# Altium PCB PCB_all_try.PcbDoc (part 2 of 5)
Units mm, origin at the board's own origin, x right, y up, seen from the top; angles counter-clockwise.
Board outline 345 x 240 mm, 2 copper layers (Top Layer, Bottom Layer); 484 components, 419 nets, 1569 pads, 699 vias.
Unrouted connection lines stored in the file: 63.
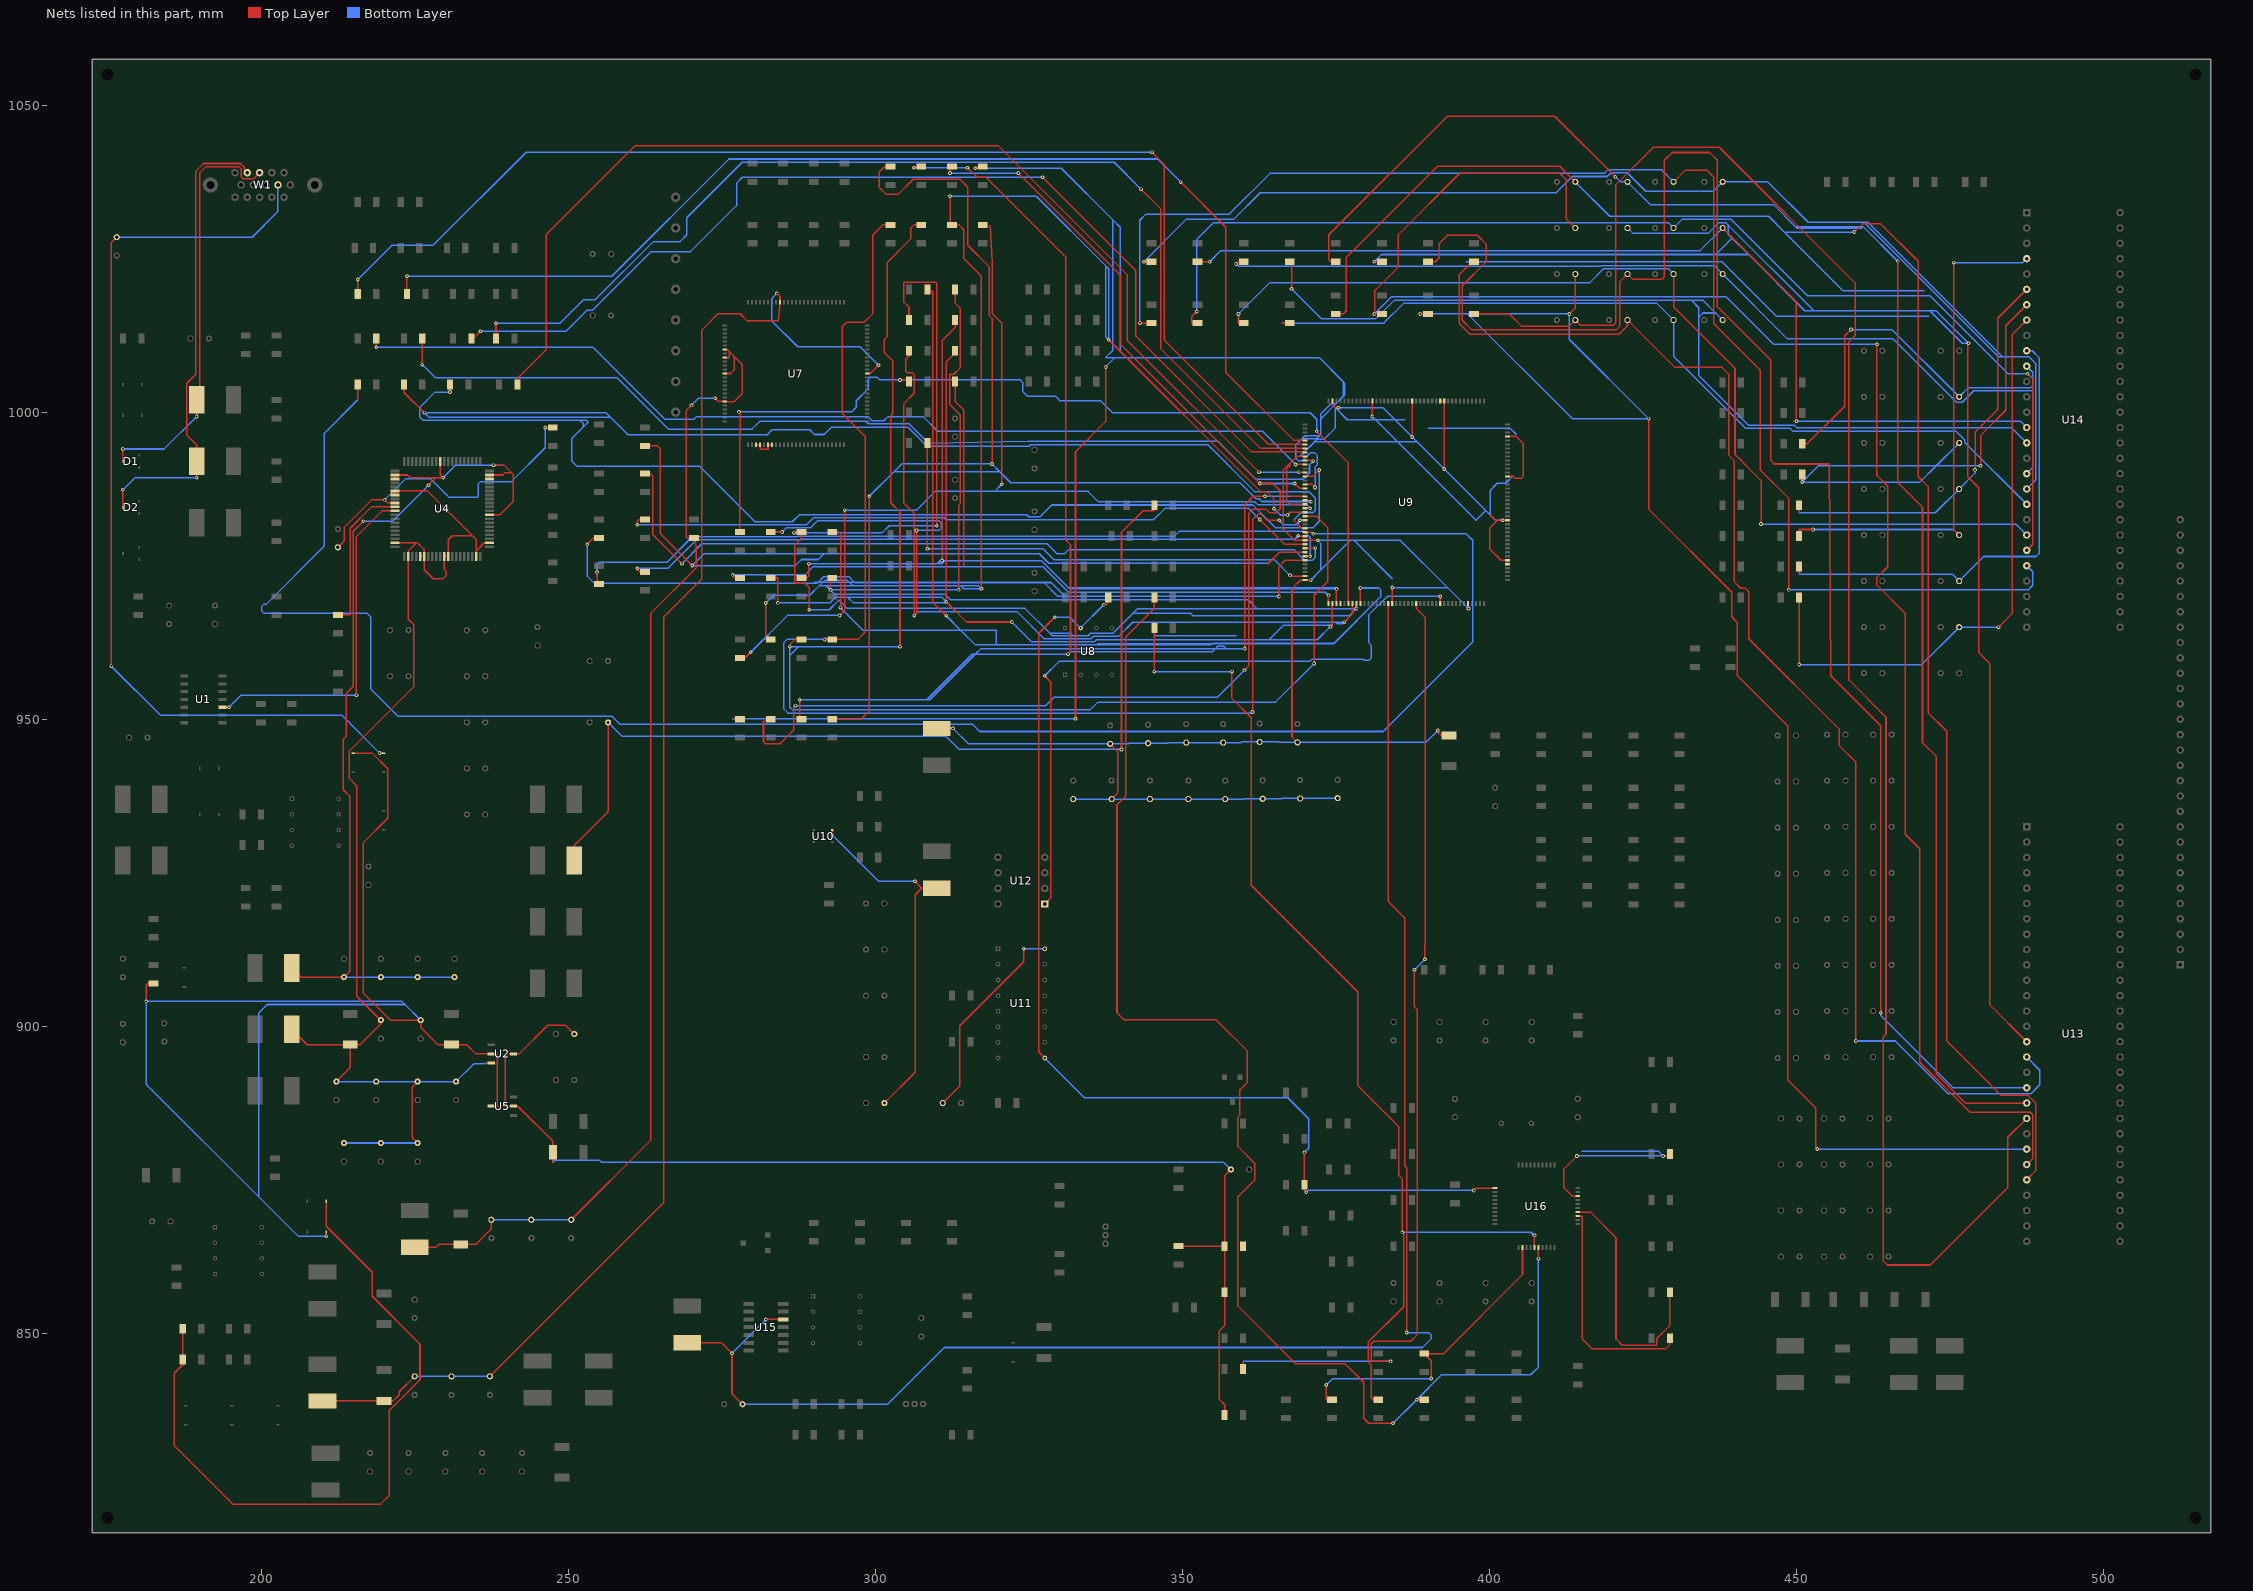
[diagram p2: the nets of this part, all layers, seen from the top]

## Via types
v1: diameter 0.6, hole 0.3, Top Layer to Bottom Layer, 699 vias

## Nets (pads, with @x,y where several pads share a name; then routed paths per layer and width w, separated by ;. In a path a pad name is that pad's centre, name@x,y a point inside that pad or via, vN(x,y) a via of type N, cw(c..) or ccw(c..) an arc to the next point about the centre after c; other vN are vias at no path point) (continued)
3V3SD: C64.1 C65.2 C66.2 C67.2 C68.2 C69.2 C71.2 C73.2 C75.2 C77.2 C81.2 C85.2 C89.2 C94.2 C98.2 L19.2 U9.17 U9.36 U9.45 U9.46 U9.56 U9.67 U9.77 U9.91 U9.92 U9.99 U9.109 U9.119 U9.129 U9.141 U9.150 U9.160 | length 436.1
  Top Layer w0.25: L19.2@310,948.5 312.662,948.5 v1(312.674,948.512) ; C98.2@338.25,946 339.496,944.754 339.496,937.996 C73.2@338.5,937 ; C77.2@368.75,946.25 367.868,947.132 367.868,971.296 369.222,972.65 U9.160@370,972.65 v1(370.906,972.65) ; U9.141@370,985 367.506,985 366.986,985.52 366.986,991.14 ; U9.129@370,992.8 368.646,992.8 367.462,991.616 ; v1(372.062,979.15) U9.150@370,979.15 368.269,979.15 366.47,980.949 366.47,990.624 366.986,991.14 ; U9.119@374.45,1001.8 374.45,1001.198 374.936,1000.712 v1(375.444,1000.712) ; v1(380.95,999.286) U9.109@380.95,1001.8 ; U9.17@384.2,968.85 v1(384.2,971.448) ; v1(387.45,995.961) U9.99@387.45,1001.8 ; v1(391.592,948.157) 391.592,947.928 392.17,947.35 C64.1@393.45,947.35 ; U9.92@392,1001.8 U9.91@392.65,1001.8 v1(392.65,990.761) ; U9.36@396.55,968.85 396.55,968.065 v1(396.596,968.019) ; 400.137,983.274 401.165,982.246 ; v1(402.133,982.396) 401.316,982.396 ; U9.45@402.95,975.25 U9.46@402.95,975.9 401.923,975.9 400.082,977.741 400.082,981.162 401.165,982.246 ; U9.56@402.95,982.4 402.133,982.4 401.316,982.396 ; U9.67@402.95,989.55 403.767,989.55 ; U9.77@402.95,996.05 404.368,996.05 405.486,994.932 405.486,989.521 405.225,989.261 404.156,989.261 403.867,989.55 ; 366.986,991.14 367.462,991.616 ; 366.986,991.14 367.462,991.14 367.462,991.616 ; 401.165,982.246 401.316,982.396
  Bottom Layer w0.25: v1(312.674,948.512) 315.186,946 C98.2@338.25,946 341.3,946 341.4,946.1 C94.2@344.45,946.1 347.497,946.1 347.597,946.2 C89.2@350.65,946.2 C85.2@356.65,946.2 359.562,946.2 359.662,946.3 C81.2@362.6,946.3 365.633,946.3 365.683,946.25 C77.2@368.75,946.25 389.685,946.25 v1(391.592,948.157) ; C75.2@332.25,937 C73.2@338.5,937 C71.2@344.75,937 C69.2@351,937 C68.2@357,937 360.02,937 360.07,937.05 C67.2@363.1,937.05 366.116,937.05 366.166,937.1 C66.2@369.2,937.1 372.212,937.1 372.262,937.15 C65.2@375.3,937.15 ; 369.164,992.81 371.952,995.599 373.09,995.599 374.936,997.445 374.936,1000.712 376.87,998.778 381.458,998.778 ; 369.173,992.8 371.556,995.183 385.053,995.183 ; v1@370.899,972.642 v1(370.906,972.65) 372.516,974.26 ; v1(375.444,1000.712) 382.699,1000.712 384.633,998.778 ; v1(380.95,999.286) 381.458,998.778 ; v1(384.2,971.448) 393.167,971.448 ; 384.2,972.896 377.946,979.15 ; 386.254,998.778 384.633,998.778 ; 390.042,997.382 403.377,997.382 404.368,996.391 ; v1(396.596,968.019) 393.167,971.448 ; v1(402.133,982.396) 401.015,982.396 400.137,983.274 ; 403.767,989.55 403.767,989.516 ; 403.867,989.55 403.801,989.55 403.767,989.516 ; 372.516,974.26 377.406,979.15 ; 372.516,974.26 372.516,978.695 v1(372.062,979.15) 377.406,979.15 ; 377.406,979.15 377.946,979.15 ; 377.946,979.15 385.465,979.15 393.167,971.448 ; 381.458,998.778 384.633,998.778 ; 381.458,998.778 385.053,995.183 ; 384.633,998.778 v1(387.45,995.961) 388.228,995.183 ; 385.053,995.183 397.84,982.396 399.428,983.983 ; 385.053,995.183 388.228,995.183 ; 388.228,995.183 v1(392.65,990.761) 399.428,983.983 ; 399.428,983.983 400.137,983.274 ; 400.137,983.274 400.137,987.258 401.295,988.416 402.666,988.416 403.767,989.516
5V_DDC: D6.1 R50.2 R51.2 | length 115.4
  Top Layer w0.25: R50.2@187.25,850.75 R51.2@187.25,845.75 187.25,844.906 185.852,843.507 185.852,831.748 195.402,822.198 219.456,822.198 220.853,823.595 220.853,837.422 225.879,842.448 225.879,848.236 218.084,856.031 218.084,859.968 210.6,867.452 D6.1@210.6,871.5
5V_STBY: C6.1 C9.1 C35.1 C36.1 C169.1 D4.1 D7.1 R1.2 R206.1 R207.1 R209.1 R236.2 U2.2 U2.4 U5.2 U5.4 | length 435.7
  Top Layer w0.25: v1(181.28,904.062) 181.28,906.67 181.61,907 R1.2@182.5,907 ; v1(210.6,865.835) D7.1@210.6,866.5 ; D4.1@215,944.5 218.058,944.5 220.624,941.934 220.624,933.882 216.611,929.869 216.611,905.459 221.07,901 C9.1@226,901 226,899.82 228.82,897 C6.1@231,897 233.477,897 234.977,895.5 U2.2@237.5,895.5 238.43,895.5 238.43,887 ; U5.4@237.5,887 238.43,887 ; 247.5,877.877 C35.1@247.5,879.5 247.5,881.308 241.808,887 U5.2@241.1,887 240.284,887 ; C36.1@251,898.75 249.574,900.176 246.678,900.176 242.002,895.5 U2.4@241.1,895.5 240.284,895.5 239.776,894.992 239.776,887.508 240.284,887 ; R236.2@349.4,864.2 R206.1@356.9,864.2 ; R209.1@356.9,836.7 356.9,838.373 356.057,839.216 356.057,850.438 356.9,851.281 R207.1@356.9,856.7 R206.1@356.9,864.2 ; C169.1@357.9,876.7 356.9,875.7 R206.1@356.9,864.2 ; 238.43,887 240.284,887
  Bottom Layer w0.25: v1(210.6,865.835) 206.019,865.835 199.644,872.211 ; C9.1@226,901 223.446,903.554 ; 247.498,877.875 247.805,878.182 255.104,878.182 255.411,877.875 356.725,877.875 C169.1@357.9,876.7 ; 199.644,872.211 181.28,890.575 v1(181.28,904.062) 222.938,904.062 223.446,903.554 ; 199.644,872.211 199.644,902.208 200.99,903.554 223.446,903.554
5V_VGA: C172.2 D5.1 W1.9 | length 152.8
  Top Layer w0.25: v1(175.616,958.647) 175.616,1027.616 C172.2@176.5,1028.5 ; v1(219.304,944.5) D5.1@220,944.5
  Bottom Layer w0.25: v1(175.616,958.647) 183.591,950.671 213.132,950.671 v1(219.304,944.5) ; C172.2@176.5,1028.5 198.548,1028.5 202.75,1032.702 W1.9@202.75,1037
5Va: C130.2 U11.16 | length 34
  Top Layer w0.25: C130.2@311,887.5 313.766,890.266 313.766,900.085 324.178,910.497 v1(324.178,912.62)
  Bottom Layer w0.25: v1(324.178,912.62) U11.16@327.62,912.62
5Vb: C128.1 L20.2 U10.5 | length 58.9
  Top Layer w0.25: v1(293,931.139) U10.5@293,931.9 ; C128.1@301.5,887.5 306.502,892.502 306.502,921.408 307.594,922.5 ; v1(306.474,923.62) 307.594,922.5 ; L20.2@310,922.5 307.594,922.5
  Bottom Layer w0.25: v1(293,931.139) 300.518,923.62 v1(306.474,923.62)
12MHZ: C158.1 L24.1 U9.16 U15.12 | length 268.9
  Top Layer w0.25: L24.1@269.4,848.46 274.98,848.46 v1(276.682,846.758) 276.682,840.178 C158.1@278.4,838.46 ; v1(282.194,852.27) U15.12@285,852.27 ; U9.16@383.55,968.85 383.55,920.308 386.213,917.645 386.213,877.294 386.563,876.944 v1(386.563,850.131)
  Bottom Layer w0.25: v1(276.682,846.758) v1(282.194,852.27) ; C158.1@278.4,838.46 301.987,838.46 311.226,847.7 389.128,847.7 390.518,849.09 390.518,849.757 390.144,850.131 v1(386.563,850.131)
9883_HS: R14.2 U4.30 | length 24.8
  Top Layer w0.25: R14.2@212.5,967 214.435,967 214.518,967.083 214.518,981.101 217.991,984.575 U4.30@221.778,984.575
9883_VS: U1.10 U4.31 | length 56.5
  Top Layer w0.25: U1.10@193.7,951.96 v1(194.767,951.96) ; v1(215.526,953.922) 215.526,979.776 219.675,983.925 U4.31@221.778,983.925
  Bottom Layer w0.25: v1(194.767,951.96) 196.73,953.922 v1(215.526,953.922)
+3V3: C1.1 C2.1 C3.1 C4.1 L1.1 U4.11 U4.22 U4.23 U4.69 U4.78 U4.79 | length 157.8
  Top Layer w0.25: L1.1@205,909.5 206.5,908 C1.1@213.5,908 214.401,908.901 214.401,937.503 213.368,938.536 213.368,946.698 213.868,947.198 213.868,954.202 215.022,955.356 215.022,980.603 v1(216.662,982.243) ; U4.23@221.778,989.125 U4.22@221.778,989.775 223.876,989.775 224.321,989.33 228.466,989.33 ; v1(227.252,988.116) 228.466,989.33 ; U4.11@229.175,991.972 229.175,989.796 v1(229.641,989.33) 228.466,989.33 ; U4.69@237.222,983.275 238.852,983.275 241.09,985.513 241.09,989.863 240.792,990.161 ; U4.78@237.222,989.125 U4.79@237.222,989.775 238.926,989.775 ; v1(237.846,991.381) 239.573,991.381 240.792,990.161 ; 238.926,989.775 239.065,989.775 ; 238.926,989.775 239.065,989.914 239.065,989.775 ; 239.065,989.775 239.346,989.775 239.732,990.161 240.792,990.161
  Bottom Layer w0.25: C1.1@213.5,908 C2.1@219.5,908 C3.1@225.5,908 C4.1@231.5,908 ; v1(216.662,982.243) 221.379,982.243 v1(227.252,988.116) ; v1(229.641,989.33) 231.692,991.381 v1(237.846,991.381) 239.065,991.381
A3_3V: C57.1 C58.2 C59.2 C60.2 L18.2 R59.1 U7.82 U7.84 U7.88 U7.95 | length 194.7
  Top Layer w0.25: L18.2@225,864 228.498,864 228.998,864.5 C57.1@232.5,864.5 234.975,864.5 237.5,867.025 C58.2@237.5,868.5 ; C60.2@250.5,868.5 263.423,881.423 263.423,967.207 270.891,974.674 270.891,978.078 R59.1@270.5,979.5 269.494,979.5 269.24,979.754 269.24,1000.277 v1(270.078,1001.116) ; v1(273.939,1002.259) 274.448,1001.75 U7.95@275.5,1001.75 275.55,1001.7 277.012,1001.7 278.352,1003.039 278.352,1007.777 277.012,1009.117 ; U7.88@275.5,1006.3 276.456,1006.3 277.012,1006.856 277.012,1009.117 ; U7.84@275.5,1008.9 276.225,1008.9 276.225,1009.904 ; U7.82@275.5,1010.2 275.929,1010.2 276.225,1009.904 ; 276.225,1009.904 277.012,1009.117
  Bottom Layer w0.25: C58.2@237.5,868.5 C59.2@244,868.5 C60.2@250.5,868.5 ; v1(270.078,1001.116) 271.221,1002.259 v1(273.939,1002.259)
A3V3: C12.1 C14.1 C26.1 C28.1 C30.1 C31.1 C32.1 C33.1 C34.1 L7.1 U2.3 U4.26 U4.27 U4.39 U4.42 U4.45 U4.46 U4.51 U4.52 U4.59 U4.62 | length 205.9
  Top Layer w0.25: L7.1@205,899.5 207.5,897 C14.1@214.5,897 ; C34.1@212.25,891 214.5,893.25 C14.1@214.5,897 ; U4.39@221.778,978.725 224.886,978.725 ; U4.27@221.778,986.525 U4.26@221.778,987.175 227.109,987.175 234.41,979.874 ; C26.1@225.5,881 224.612,881.888 224.612,890.112 C32.1@225.5,891 ; U4.45@225.925,976.528 U4.46@226.575,976.528 ; U4.59@235.025,976.528 235.025,977.392 ; 236.572,894 U2.3@237.5,894 ; U4.62@237.222,978.725 236.358,978.725 235.025,977.392 ; C14.1@214.5,897 216.128,897 219.5,900.372 C12.1@219.5,901 215.595,904.905 215.595,939.123 214.376,940.342 214.376,944.829 224.892,955.345 224.892,965.378 223.975,966.294 U4.42@223.975,976.528 223.975,977.415 225.086,978.526 224.886,978.725 ; 224.886,978.725 225.464,978.725 226.543,977.646 226.543,977.069 226.575,977.036 U4.46@226.575,976.528 ; U4.46@226.575,976.528 226.575,974.344 228.048,972.871 229.636,972.871 230.124,973.359 230.124,974.07 229.825,974.369 U4.51@229.825,976.528 U4.52@230.475,976.528 230.475,979.216 231.133,979.874 234.41,979.874 ; 234.41,979.874 235.025,979.259 235.025,977.392
  Bottom Layer w0.25: C34.1@212.25,891 C33.1@218.75,891 C32.1@225.5,891 C31.1@231.75,891 234.652,893.902 236.474,893.902 236.572,894 ; C30.1@213.5,881 C28.1@219.5,881 C26.1@225.5,881
ADC1: R222.2 U16.34 | length 41
  Top Layer w0.25: U16.34@414.4,869.75 416.455,869.75 420.624,865.581 420.624,849.071 421.64,848.055 427.228,848.055 427.228,849.109 429.4,851.281 R222.2@429.4,856.7
ADC2: R224.2 U16.33 | length 37
  Top Layer w0.25: U16.33@414.4,869.1 415.138,869.1 415.138,849.071 416.687,847.522 428.752,847.522 429.4,848.17 R224.2@429.4,849.2
ASIC_H: C39.1 L9.2 R108.2 | length 153.3
  Top Layer w0.25: L9.2@251,927 251,929.434 256.5,934.934 C39.1@256.5,949.5 ; v1(340.106,945.083) 340.106,980.44 343.631,983.965 345.45,983.965 R108.2@345.45,984.85
  Bottom Layer w0.25: C39.1@256.5,949.5 258.732,947.268 311.506,947.268 313.69,945.083 v1(340.106,945.083)
ASIC_RESET: R118.2 R182.1 U8.7 U11.9 U16.11 | length 175.8
  Top Layer w0.25: U11.9@327.62,894.84 326.619,895.841 326.619,964.006 v1(329.235,966.622) ; v1(337.229,968.629) 337.569,968.629 337.95,969.01 R118.2@337.95,969.85 ; v1(369.9,879.475) R182.1@369.9,874.2 369.9,873.277 v1(370.205,872.973) ; v1(397.483,873.277) 397.856,873.65 U16.11@400.95,873.65
  Bottom Layer w0.25: U11.9@327.62,894.84 334.095,888.365 367.157,888.365 370.586,884.936 370.586,880.161 v1(369.9,879.475) ; v1(329.235,966.622) 331.678,966.622 U8.7@333.45,964.85 v1(337.229,968.629) ; v1(370.205,872.973) 370.51,873.277 v1(397.483,873.277)
ASIC_SCL: R114.2 R221.2 U16.26 | length 223.2
  Top Layer w0.25: R114.2@345.45,969.85 345.45,968.055 340.792,963.397 340.792,937.514 339.369,936.092 339.369,902.208 340.512,901.065 355.498,901.065 360.604,895.96 360.604,890.905 359.385,889.686 359.385,885.571 359.054,885.241 359.054,880.415 361.798,877.672 361.798,874.979 359.054,872.236 359.054,854.456 368.478,845.033 376.555,845.033 379.552,842.035 379.552,836.168 380.365,835.355 v1(384.318,835.355) ; v1(388.163,839.2) R221.2@389.4,839.2 ; v1(408,862.178) U16.26@408,864
  Bottom Layer w0.25: v1(384.318,835.355) v1(388.163,839.2) 392.217,843.255 406.756,843.255 408,844.499 v1(408,862.178)
ASIC_SDA: R115.2 R219.2 U16.25 | length 191.2
  Top Layer w0.25: v1(345.45,957.758) R115.2@345.45,964.85 ; v1(358.089,957.758) 358.089,953.389 361.239,950.239 361.239,922.985 378.587,905.637 378.587,890.346 385.242,883.691 385.242,875.767 385.801,875.208 v1(385.801,866.445) 386.055,866.191 386.055,854.354 380.263,848.563 380.263,845.337 380.771,844.829 380.771,839.47 381.041,839.2 R219.2@381.9,839.2 ; U16.25@407.35,864 v1(407.35,865.962)
  Bottom Layer w0.25: 345.44,963.625 358.775,963.625 ; v1(345.45,957.758) v1(358.089,957.758) ; v1(385.801,866.445) 406.69,866.445 ; v1@407.162,865.972 406.69,866.445 ; v1(407.35,865.962) 406.867,866.445 406.69,866.445
AUDIO_EN: R215.2 U16.38 | length 37.9
  Top Layer w0.25: v1(414.274,878.891) 412.148,876.764 412.148,873.714 413.512,872.35 U16.38@414.4,872.35 ; v1(428.295,878.891) 429.4,878.891 R215.2@429.4,879.2
  Bottom Layer w0.25: v1(414.274,878.891) v1(428.295,878.891) 427.533,879.653 415.036,879.653
AUDIO_MUTE: R212.2 R233.1 U16.22 | length 51.2
  Top Layer w0.25: v1(373.447,841.594) 373.447,839.2 R233.1@374.4,839.2 ; v1(390.55,842.645) 390.55,845.55 R212.2@389.4,846.7 392.523,846.7 405.4,859.577 U16.22@405.4,864
  Bottom Layer w0.25: v1(373.447,841.594) 374.498,842.645 v1(390.55,842.645)
B_IN: D1.3 L4.1 W1.3 | length 68.5
  Top Layer w0.25: D1.3@177.5,992 v1(177.5,994.004) ; v1(189.509,999.312) 189.5,999.322 L4.1@189.5,1002 189.5,1003.783 189.992,1003.783 189.992,1038.962 191.019,1039.989 196.372,1039.989 196.739,1039.622 196.739,1038.352 197.095,1037.996 198.746,1037.996 W1.3@199.75,1039
  Bottom Layer w0.25: v1(177.5,994.004) 184.201,994.004 v1(189.509,999.312)
B_INA0: R32.2 U9.147 | length 197.9
  Top Layer w0.25: R32.2@223.25,1004.5 223.25,1003.265 v1(226.593,999.922) ; 368.198,982.472 368.198,982.37 369.469,981.1 U9.147@370,981.1
  Bottom Layer w0.25: 368.198,982.37 368.198,982.472 369.392,983.666 371.348,983.666 371.653,983.971 371.653,986.028 370.662,987.019 361.848,987.019 354.138,994.729 325.337,994.729 325.069,994.461 308.431,994.461 305.357,997.534 292.862,997.534 291.694,996.366 290.119,996.366 289.357,997.128 283.21,997.128 282.423,996.34 259.74,996.34 256.896,999.185 ; 256.896,999.185 256.159,999.922 v1(226.593,999.922) 227.33,999.185 256.896,999.185
B_INA1: R31.2 U9.148 | length 306.2
  Top Layer w0.25: 215.75,1002.007 R31.2@215.75,1004.5 ; U9.148@370,980.45 371.059,980.45 v1(371.323,980.186)
  Bottom Layer w0.25: 215.75,1002.007 210.287,996.544 210.287,978.205 200.78,968.698 200.406,968.698 200.076,968.368 200.076,967.613 200.406,967.283 217.221,967.283 217.856,966.648 217.856,954.913 222.275,950.493 257.15,950.493 258.445,949.198 315.824,949.198 317.017,948.004 382.727,948.004 397.281,962.558 397.281,979.145 396.24,980.186 v1(371.323,980.186)
B_INA2: R30.2 U9.149 | length 112.6
  Top Layer w0.25: v1(261.264,974.598) 261.264,974.344 261.608,974 R30.2@262.5,974 ; v1(368.884,979.881) 368.965,979.8 U9.149@370,979.8
  Bottom Layer w0.25: v1(261.264,974.598) 266.243,974.598 270.851,979.206 287.949,979.206 288.065,979.322 368.325,979.322 v1(368.884,979.881)
B_INA3: R29.2 U9.151 | length 114.4
  Top Layer w0.25: v1(261.264,981.659) 261.264,982.218 261.546,982.5 R29.2@262.5,982.5 ; v1(362.627,982.532) 366.659,978.5 U9.151@370,978.5
  Bottom Layer w0.25: v1(261.264,981.659) 288.806,981.659 289.957,982.81 311.229,982.81 311.572,982.467 345.326,982.467 347.185,984.326 360.832,984.326 v1(362.627,982.532)
B_INA4: R28.2 U9.152 | length 127.2
  Top Layer w0.25: R28.2@262.5,990 263.398,990 263.754,989.644 263.754,980.11 v1(268.529,975.335) ; U9.152@370,977.85 v1(371.678,977.85)
  Bottom Layer w0.25: v1(268.529,975.335) 271.755,978.56 327.99,978.56 329.634,976.916 330.777,976.916 331.482,977.621 368.198,977.621 369.951,975.868 371.17,975.868 371.678,976.376 v1(371.678,977.85)
B_INA5: R27.2 U9.153 | length 148.2
  Top Layer w0.25: R27.2@262.5,994.5 264.566,994.5 264.998,994.068 264.998,980.237 v1(270.205,975.03) ; 364.007,975.385 365.822,977.2 U9.153@370,977.2
  Bottom Layer w0.25: 364.084,975.309 364.007,975.385 328.244,975.385 326.695,976.935 291.65,976.935 ; 291.65,976.935 272.11,976.935 v1(270.205,975.03) 287.001,975.03 287.985,976.014 290.728,976.014 291.65,976.935
B_INA6: R26.2 U9.154 | length 126.7
  Top Layer w0.25: v1(254.711,973.912) 254.711,972 R26.2@255,972 ; U9.154@370,976.55 v1(370.815,976.55)
  Bottom Layer w0.25: 254.711,973.404 v1(254.711,973.912) 254.711,975.284 254.965,975.538 266.04,975.538 270.212,979.71 287.332,979.71 287.452,979.83 348.717,979.83 349.529,980.643 369.824,980.643 370.815,979.653 v1(370.815,976.55)
B_INA7: R25.2 U9.155 | length 173.9
  Top Layer w0.25: v1(253.086,978.484) 254.101,979.5 R25.2@255,979.5 ; v1(365.735,970.001) 365.735,974.859 366.776,975.9 U9.155@370,975.9
  Bottom Layer w0.25: v1(253.086,978.484) 253.086,973.328 254.305,972.109 290.017,972.109 ; v1(365.735,970.001) 362.28,970.001 330.937,970.001 ; 290.017,972.109 290.538,972.109 290.716,972.287 ; 290.017,972.109 290.195,972.287 290.716,972.287 ; 290.716,972.287 291.628,973.199 295.735,973.199 296.647,972.287 ; 290.716,972.287 296.647,972.287 ; 296.647,972.287 296.664,972.269 327.474,972.269 ; 296.647,972.287 327.457,972.287 327.474,972.269 ; 327.474,972.269 328.668,972.269 330.937,970.001 ; 327.474,972.269 329.743,970.001 330.937,970.001
B_INB0: R73.2 R97.2 U9.1 | length 133.1
  Top Layer w0.25: v1(276.784,973.506) 276.784,973.328 277.112,973 R73.2@278,973 ; R97.2@313,1005 313,1001.766 314.383,1000.383 314.383,974.91 ; U9.1@373.8,968.85 v1(373.8,970.178)
  Bottom Layer w0.25: v1(276.784,973.506) 288.57,973.506 289.891,974.827 314.467,974.827 ; 314.383,974.91 314.467,974.827 ; v1(373.8,970.178) 373.292,970.686 331.47,970.686 327.33,974.827 314.467,974.827
B_INB1: R72.2 R96.2 U9.2 | length 172.5
  Top Layer w0.25: R72.2@283,973 284.15,973 v1(284.15,968.951) ; R96.2@313,1010 313,1009.595 311.582,1008.177 v1(311.582,969.137) 314.884,965.835 v1(322.25,965.835) ; v1(374.149,965.102) 374.45,965.403 U9.2@374.45,968.85
  Bottom Layer w0.25: v1(284.15,968.951) 292.608,968.951 293.52,969.863 295.544,969.863 ; v1(322.25,965.835) 325.486,962.599 335.701,962.599 336.042,962.939 364.109,962.939 ; 295.544,969.863 310.856,969.863 v1(311.582,969.137) 311.396,968.951 296.455,968.951 295.544,969.863 ; 364.109,962.939 371.986,962.939 v1(374.149,965.102) 373.942,965.31 366.479,965.31 364.109,962.939
B_INB2: R71.2 R95.2 U9.3 | length 179.8
  Top Layer w0.25: R71.2@288,973 288.851,973 289.179,973.328 v1(289.179,975.335) ; v1(310.896,975.843) 310.896,1011.635 313,1013.739 R95.2@313,1015 ; U9.3@375.1,968.85 v1(375.1,971.234)
  Bottom Layer w0.25: v1(289.179,975.335) 310.058,975.335 ; 310.896,976.173 310.058,975.335 ; v1(375.1,971.234) 331.639,971.234 331.501,971.372 ; v1@375.1,971.372 331.501,971.372 ; 310.058,975.335 310.388,975.335 ; 310.388,975.335 310.896,975.335 311.404,975.843 ; 310.388,975.335 v1(310.896,975.843) 311.404,975.843 ; 311.404,975.843 327.031,975.843 331.501,971.372
B_INB3: R70.2 R94.2 U9.4 | length 159.4
  Top Layer w0.25: v1(292.71,971.067) 292.71,973 R70.2@293,973 ; R94.2@313,1020 313,1017.778 313.825,1016.953 313.825,1007.212 312.784,1006.17 312.166,1006.17 312.166,1001.203 313.879,999.49 313.879,985.114 313.588,984.823 v1(313.588,971.067)
  Bottom Layer w0.25: 292.1,971.657 293.39,970.367 311.361,970.367 312.261,969.467 360.734,969.467 362.182,968.019 375.742,968.019 ; v1(292.71,971.067) v1(313.588,971.067)
B_INB4: R69.2 R93.2 U9.6 | length 158.6
  Top Layer w0.25: v1(277.825,1000.049) 278.028,999.846 278.028,996.721 277.927,996.62 277.927,980.5 R69.2@278,980.5 ; v1(304.038,1005.256) 305.5,1005.256 R93.2@305.5,1005 ; v1(371.907,996.874) 377.05,991.731 U9.6@377.05,968.85
  Bottom Layer w0.25: v1(277.825,1000.049) 296.164,1000.049 296.926,1000.811 296.926,1001.878 298.831,1003.783 298.831,1005.332 299.187,1005.688 300.279,1005.688 300.685,1005.281 ; v1(371.907,996.874) 371.907,998.855 370.84,999.922 338.633,999.922 336.702,1001.852 330.074,1001.852 329.336,1002.59 324.789,1002.59 324.053,1003.325 324.053,1004.799 323.571,1005.281 v1@304.063,1005.281 ; 300.685,1005.281 v1@304.063,1005.281 ; 300.685,1005.281 300.711,1005.256 v1(304.038,1005.256) v1@304.063,1005.281
B_INB5: R68.2 R92.2 U9.7 | length 171.8
  Top Layer w0.25: R68.2@283,980.5 v1(284.845,980.5) ; R92.2@305.5,1010 305.5,1009.091 304.978,1008.569 304.978,1006.729 305.308,1006.399 306.07,1006.399 306.349,1006.119 306.349,1003.071 304.673,1001.395 304.673,985.164 306.349,983.488 v1(306.349,966.876) 306.73,967.257 v1(306.73,980.745) ; v1(376.381,965.814) 377.647,967.08 U9.7@377.647,968.576 ; U9.7@377.647,968.576 U9.7@377.7,968.85 377.7,968.629 U9.7@377.647,968.576
  Bottom Layer w0.25: v1(284.845,980.5) 285.496,981.151 289.433,981.151 290.588,982.306 310.388,982.306 310.718,981.976 310.718,981.075 310.388,980.745 v1(306.73,980.745) ; v1(306.349,966.876) 307.003,967.53 323.069,967.53 327.497,963.103 335.132,963.103 335.516,963.487 339.612,963.487 341.939,965.814 374.955,965.814 ; 376.098,965.53 375.238,965.53 374.955,965.814 ; v1(376.381,965.814) 374.955,965.814
B_INB6: R67.2 R91.2 U9.8 | length 227.2
  Top Layer w0.25: v1(286.766,980.389) 286.877,980.5 R67.2@288,980.5 288,979.49 286.868,978.357 286.868,972.16 288.544,972.16 289.255,971.448 v1(289.255,967.842) ; R91.2@305.5,1015 305.5,1017.103 304.673,1017.93 304.673,1021.131 309.88,1021.131 310.032,1020.978 v1(310.032,981.507) ; v1(378.35,968.019) U9.8@378.35,968.85
  Bottom Layer w0.25: v1(286.766,980.389) 301.168,980.389 302.285,981.507 v1(310.032,981.507) ; v1(289.255,967.842) 292.513,967.842 294.03,969.359 294.139,969.359 295.46,968.038 324.411,968.038 328.417,964.032 ; 328.417,964.032 328.842,963.607 332.207,963.607 ; 328.417,964.032 331.782,964.032 332.207,963.607 ; 332.207,963.607 334.693,963.607 335.077,963.991 338.719,963.991 341.979,967.251 ; 341.979,967.251 342.748,968.019 v1(378.35,968.019) 377.156,966.826 374.959,966.826 374.897,966.888 351.694,966.888 351.332,967.251 341.979,967.251
B_INB7: R66.2 R90.2 U9.9 | length 219.5
  Top Layer w0.25: R66.2@293,980.5 294.047,980.5 294.361,980.186 v1(294.361,968.172) ; R90.2@308.5,1020 308.5,1019.708 309.347,1019.708 309.347,969.061 v1(311.556,966.851) ; U9.9@379,968.85 v1(379,971.372)
  Bottom Layer w0.25: v1(294.361,968.172) 298.069,964.463 313.944,964.463 ; v1(311.556,966.851) 313.944,964.463 ; v1(379,971.372) 382.016,971.372 382.295,971.093 382.295,969.95 374.731,962.386 ; 313.944,964.463 316.313,962.095 319.71,962.095 ; 313.944,964.463 319.71,964.463 319.71,962.095 ; 319.71,962.095 336.029,962.095 ; 336.029,962.095 354.619,962.095 354.795,962.271 ; 336.029,962.095 336.205,962.271 354.795,962.271 ; 354.795,962.271 354.91,962.386 374.731,962.386 ; 354.795,962.271 374.617,962.271 374.731,962.386
BA0: C117.2 R136.1 U14.16 | length 153.3
  Top Layer w0.25: R136.1@367.5,1024.5 367.792,1024.5 v1(367.792,1020.089)
  Bottom Layer w0.25: v1(367.792,1020.089) 372.643,1015.238 381.533,1015.238 384.556,1018.261 432.867,1018.261 ; C117.2@438,1015 436.848,1016.152 ; U14.16@487.5,995 485.064,997.436 450.106,997.436 449.642,997.901 442.178,997.901 434.111,1005.967 434.111,1015.492 ; 432.867,1018.261 434.739,1018.261 436.848,1016.152 ; 432.867,1018.261 434.111,1017.016 434.111,1015.492 ; 434.111,1015.492 434.772,1016.152 436.848,1016.152
BA1: C114.2 R135.1 U14.18 | length 155.2
  Top Layer w0.25: v1(358.775,1024.128) 359.147,1024.5 R135.1@360,1024.5
  Bottom Layer w0.25: v1(358.775,1024.128) 359.105,1023.798 418.117,1023.798 418.202,1023.883 436.617,1023.883 C114.2@438,1022.5 448.564,1011.936 465.76,1011.936 476.075,1001.621 477.012,1001.621 478.894,1003.503 488.467,1003.503 488.493,1003.478 488.493,990.993 U14.18@487.5,990
BA2: C111.2 R134.1 U14.15 | length 162.1
  Top Layer w0.25: R134.1@352.5,1024.5 v1(354.456,1024.5) ; C111.2@438,1030 450.012,1017.988 v1(450.012,998.525)
  Bottom Layer w0.25: v1(354.456,1024.5) 356.268,1026.312 434.312,1026.312 C111.2@438,1030 ; v1(450.012,998.525) 486.475,998.525 U14.15@487.5,997.5
BA3: C108.2 R133.1 U14.19 | length 219.2
  Top Layer w0.25: v1(343.764,1024.5) R133.1@345,1024.5
  Bottom Layer w0.25: v1(343.764,1024.5) 350.707,1031.443 358.419,1031.443 362.712,1035.736 410.845,1035.736 413.488,1038.379 419.217,1038.379 419.843,1039.006 422.46,1039.006 425.475,1035.99 436.49,1035.99 C108.2@438,1037.5 445.352,1037.5 451.942,1030.91 461.01,1030.91 ; U14.19@487.5,987.5 489.001,989.001 489.001,1007.872 487.858,1009.015 483.567,1009.015 ; 461.01,1030.91 461.673,1030.91 483.567,1009.015 ; 461.01,1030.91 482.905,1009.015 483.567,1009.015
BA4: C105.2 R132.1 U14.20 | length 157.6
  Top Layer w0.25: 366.274,1014.5 R132.1@367.5,1014.5
  Bottom Layer w0.25: 366.272,1014.501 382.821,1014.501 ; 366.274,1014.5 382.819,1014.5 382.821,1014.501 ; U14.20@487.5,985 477.393,995.107 477.393,995.502 476.021,996.874 449.468,996.874 448.945,997.396 441.717,997.396 430,1009.113 C105.2@430,1015 427.291,1017.709 386.028,1017.709 382.821,1014.501
BA5: C102.2 R131.1 U14.22 | length 167.2
  Top Layer w0.25: v1(359.156,1016) 359.156,1014.5 R131.1@360,1014.5 ; C102.2@430,1022.5 430,1017.165 440.004,1007.161 440.004,993.14 444.246,988.898 v1(444.246,981.786)
  Bottom Layer w0.25: v1(359.156,1016) 364.211,1021.055 416.293,1021.055 418.617,1023.379 429.121,1023.379 C102.2@430,1022.5 ; v1(444.246,981.786) 485.714,981.786 U14.22@487.5,980
BA6: C99.2 R128.1 U14.23 | length 192.2
  Top Layer w0.25: v1(352.374,1016.406) 351.536,1015.568 351.536,1014.5 R128.1@352.5,1014.5 ; U14.23@487.5,977.5 488.493,978.493 488.493,1005.434 v1(487.68,1006.246)
  Bottom Layer w0.25: v1(352.374,1016.406) 352.374,1028.141 355.117,1030.884 429.116,1030.884 C99.2@430,1030 431.383,1031.383 439.383,1031.383 451.769,1018.997 471.715,1018.997 484.466,1006.246 v1(487.68,1006.246)
BA7: C95.2 R127.1 U14.24 | length 233.5
  Top Layer w0.25: v1(343.103,1014.5) R127.1@345,1014.5 ; C95.2@430,1037.5 431.868,1039.368 435.468,1039.368 436.524,1038.312 436.524,1014.451 444.126,1006.849 444.126,990.581 448.779,985.928 v1(448.779,971.067)
  Bottom Layer w0.25: v1(343.103,1014.5) 343.078,1014.525 343.078,1031.24 344.094,1032.256 357.657,1032.256 364.284,1038.883 418.713,1038.883 419.339,1039.51 427.99,1039.51 C95.2@430,1037.5 ; v1(448.779,971.067) 487.756,971.067 488.493,971.804 488.493,974.007 U14.24@487.5,975
BB0: C91.2 R126.1 U13.16 | length 297.1
  Top Layer w0.25: R126.1@397.5,1024.5 397.2,1024.5 395.076,1022.375 395.076,1014.468 396.846,1012.698 421.132,1012.698 422.5,1014.066 C91.2@422.5,1015 430.212,1007.288 437.896,1007.288 438.963,1006.221 438.963,993.013 439.852,992.124 439.852,972.414 440.944,971.321 441.706,971.321 442.239,970.788 442.239,963.117 456.946,948.411 456.946,945.744 459.689,943 v1(459.689,897.611)
  Bottom Layer w0.25: 396.265,1024.509 437.871,1024.509 446.786,1015.594 471.576,1015.594 ; v1(459.689,897.611) 466.086,897.611 474.676,889.021 488.188,889.021 489.636,890.469 489.636,892.864 U13.16@487.5,895
BB1: C86.2 R125.1 U13.18 | length 282.1
  Top Layer w0.25: R125.1@390,1024.5 391.202,1024.5 391.846,1025.144 391.846,1027.455 393.192,1028.802 398.018,1028.802 399.535,1027.284 399.535,1024.528 395.58,1020.572 395.58,1014.984 397.104,1013.46 420.7,1013.46 421.208,1013.968 421.208,1021.208 C86.2@422.5,1022.5 423.387,1021.613 428.092,1021.613 428.498,1022.02 428.498,1041.019 429.768,1042.289 435.864,1042.289 437.109,1041.044 437.109,1017.194 445.846,1008.456 445.846,992.124 446.405,991.565 455.371,991.565 455.6,957.072 463.728,948.944 v1(463.728,902.208)
  Bottom Layer w0.25: v1(463.728,902.208) 463.728,901.781 475.509,890 U13.18@487.5,890
BB2: C82.2 R124.1 U13.15 | length 278
  Top Layer w0.25: v1(381.279,1024.5) R124.1@382.5,1024.5 ; v1(478.028,1011.225) 477.912,1011.109 477.912,989.474 479.704,987.682 479.704,960.882 481.457,959.129 481.457,903.543 U13.15@487.5,897.5
  Bottom Layer w0.25: v1(381.279,1024.5) 382.457,1025.677 436.88,1025.677 ; C82.2@422.5,1030 423.394,1029.106 435.615,1029.106 437.388,1030.879 438.478,1030.879 438.879,1030.478 ; 436.88,1025.677 442.189,1025.677 ; 436.88,1025.677 439.534,1028.332 ; 438.879,1030.478 452.849,1016.508 ; 438.879,1030.478 438.879,1028.987 439.534,1028.332 ; 439.534,1028.332 442.189,1025.677 ; 442.189,1025.677 451.358,1016.508 452.849,1016.508 ; 452.849,1016.508 471.729,1016.508 ; 471.729,1016.508 472.745,1016.508 v1(478.028,1011.225) 477.012,1011.225 471.729,1016.508
BB3: C78.2 R123.1 U13.19 | length 278.2
  Top Layer w0.25: R123.1@375,1024.5 374.142,1024.5 373.863,1024.779 373.863,1028.878 393.167,1048.182 410.667,1048.182 v1(420.522,1038.327) ; v1(466.522,1024.56) 466.522,988.543 470.531,984.533 470.531,946.179 472.796,943.915 472.796,892.193 477.489,887.5 U13.19@487.5,887.5
  Bottom Layer w0.25: v1(420.522,1038.327) 421.349,1037.5 C78.2@422.5,1037.5 426.195,1033.805 446.253,1033.805 449.892,1030.166 ; 460.604,1029.97 450.088,1029.97 449.892,1030.166 ; v1(466.522,1024.56) 460.915,1030.166 449.892,1030.166
BB4: C76.2 R122.1 U13.20 | length 298.7
  Top Layer w0.25: R122.1@397.5,1016 403.25,1016 405.232,1014.019 413.019,1014.019 C76.2@414,1015 414.88,1014.12 420.192,1014.12 420.548,1014.476 420.548,1036.986 426.714,1043.153 437.439,1043.153 459.555,1021.036 459.555,1012.439 458.546,1011.43 458.546,956.386 464.591,950.341 464.591,898.703 464.109,898.22 464.109,861.847 464.82,861.136 471.805,861.136 484.429,873.76 484.429,881.929 U13.20@487.5,885
BB5: C74.2 R121.1 U13.22 | length 255.8
  Top Layer w0.25: v1(388.772,1016) R121.1@390,1016 ; v1(413.026,1016) 414,1016.974 C74.2@414,1022.5 ; v1(425.933,998.957) 425.933,984.225 439.471,970.686 439.471,966.673 440.385,965.759 440.385,957.123 448.567,948.941 448.567,891.283 453.117,886.733 453.117,880.281 v1(453.39,880.008)
  Bottom Layer w0.25: v1(388.772,1016) 396.443,1016 ; v1(453.39,880.008) 453.398,880 U13.22@487.5,880 ; 396.443,1016 413.487,998.957 v1(425.933,998.957) 413.026,1011.863 v1(413.026,1016) 396.443,1016
BB6: C72.2 R120.1 U13.23 | length 295
  Top Layer w0.25: v1(381.279,1016) R120.1@382.5,1016 381.375,1016.096 381.375,1019.835 385.191,1023.651 385.191,1028.929 395.173,1038.911 411.48,1038.911 412.496,1037.895 412.496,1031.504 C72.2@414,1030 ; v1(463.118,1011.072) 463.118,989.686 464.879,987.925 464.879,974.832 463.121,973.074 463.121,971.852 467.741,967.232 467.741,931.266 470.103,928.903 470.103,894.156 478.257,886.003 488.061,886.003 488.479,885.585 488.479,878.479 U13.23@487.5,877.5
  Bottom Layer w0.25: v1(381.279,1016) 384.099,1018.819 438.506,1018.819 446.253,1011.072 v1(463.118,1011.072)
BB7: C70.2 R119.1 U13.24 | length 334.3
  Top Layer w0.25: R119.1@375,1016 376.199,1016 376.707,1016.508 376.707,1025.195 391.541,1040.028 411.472,1040.028 C70.2@414,1037.5 ; v1(459.435,1029.335) 460.756,1030.656 463.753,1030.656 469.849,1024.56 469.849,989.482 471.449,987.882 471.449,951.078 474.497,948.03 474.497,897.611 483.362,888.746 487.731,888.746 489.001,887.476 489.001,876.501 U13.24@487.5,875
  Bottom Layer w0.25: C70.2@414,1037.5 419.6,1031.9 ; v1(459.435,1029.335) 448.056,1029.335 445.491,1031.9 419.6,1031.9 ; 470.84,1019.81 457.556,1019.81 445.478,1031.887 419.613,1031.887 419.6,1031.9
BL_ON_OFF: R206.2
COAST: C25.2 R18.2 U4.29 | length 51.9
  Top Layer w0.25: C25.2@212.5,978 213.563,979.063 213.563,981.288 217.998,985.723 v1(220.116,985.723) 220.615,985.225 U4.29@221.778,985.225 ; v1(246.278,997.5) R18.2@247.5,997.5
  Bottom Layer w0.25: v1(220.116,985.723) 223.534,989.141 227.62,989.141 230.632,986.13 235.229,986.13 235.382,986.282 235.382,988.379 235.712,988.71 240.792,988.71 246.278,994.196 v1(246.278,997.5)
D3_3V: C42.1 C45.2 C47.2 C50.2 L13.2 U7.38 U7.67 | length 260.2
  Top Layer w0.25: L13.2@210,839 C42.1@220,839 221.488,839 222.511,840.023 222.511,840.511 C45.2@225,843 ; C50.2@237.25,843 265.532,871.282 265.532,966.622 271.78,972.871 271.78,1013.384 274.422,1016.025 278.028,1016.025 279.184,1014.87 284.226,1014.87 U7.67@284.5,1017.9 284.5,1018.845 v1(283.992,1019.353) ; U7.38@298.7,1006.3 299.189,1006.3 v1(300.533,1007.643)
  Bottom Layer w0.25: C45.2@225,843 C47.2@231,843 C50.2@237.25,843 ; v1(283.992,1019.353) 283.159,1018.52 283.159,1014.87 287.385,1010.645 297.532,1010.645 v1(300.533,1007.643)
D3_V3: U7.3 U7.4 U7.6 U7.7 | length 4.1
  Top Layer w0.25: U7.3@280.6,994.7 U7.4@281.25,994.7 281.25,993.953 282.55,993.953 U7.6@282.55,994.7 U7.7@283.2,994.7
DE_IN: R98.2 U9.159 | length 80.6
  Top Layer w0.25: v1(308.5,977.773) R98.2@308.5,995 ; v1(367.538,973.43) 367.668,973.3 U9.159@370,973.3
  Bottom Layer w0.25: v1(308.5,977.773) 327.304,977.773 329.082,975.995 364.973,975.995 v1(367.538,973.43)
FBLK: R189.2 U9.23 | length 159.8
  Top Layer w0.25: R189.2@359.9,844.2 359.9,845.432 ; v1(383.921,845.439) 381.004,845.439 380.775,845.668 380.775,848.313 381.169,848.707 387.189,848.707 388.239,849.757 388.239,902.767 387.807,903.199 v1(387.807,909.2) ; U9.23@388.1,968.85 388.1,968.031 389.551,966.58 389.551,913.299 389.516,913.264 v1(389.516,910.908)
  Bottom Layer w0.25: 359.893,845.439 359.907,845.439 ; 359.9,845.432 359.907,845.439 ; v1(383.921,845.439) 359.907,845.439 ; v1(387.807,909.2) v1(389.516,910.908)
FCLK1: U9.29 U12.1 | length 113.7
  Top Layer w0.25: v1(327.609,957.072) 328.599,956.082 328.599,920.899 U12.1@327.62,919.92 ; U9.29@392,968.85 v1(392,970.001)
  Bottom Layer w0.25: v1(327.609,957.072) 329.946,959.409 370.789,959.409 371.145,959.764 379.425,959.764 379.578,959.612 380.39,959.612 380.797,960.018 380.797,962.025 380.34,962.482 380.34,966.978 383.362,970.001 v1(392,970.001)
G_IN: D2.3 L5.1 W1.2 | length 76.6
  Top Layer w0.25: D2.3@177.5,984.5 v1(177.5,987.374) ; v1(189.509,989.33) 189.5,989.339 L5.1@189.5,992 189.5,994.699 187.909,996.29 187.909,1004.697 189.382,1006.17 189.382,1039.266 190.609,1040.493 196.626,1040.493 197.243,1039.876 197.243,1039.507 W1.2@197.75,1039
  Bottom Layer w0.25: v1(177.5,987.374) 179.456,989.33 v1(189.509,989.33)
G_INA0: R40.2 U9.125 | length 189.9
  Top Layer w0.25: R40.2@223.75,1019.25 v1(223.75,1022.147) ; v1(349.758,1037.463) 357.099,1030.122 357.099,1006.474 368.173,995.4 U9.125@370,995.4
  Bottom Layer w0.25: v1(223.75,1022.147) 257.099,1022.147 276.179,1041.227 345.994,1041.227 v1(349.758,1037.463)
G_INA1: R39.2 U9.126 | length 201.6
  Top Layer w0.25: R39.2@215.75,1019.25 v1(215.75,1021.612) ; v1(345.059,1042.34) 347.066,1040.333 347.066,1011.757 364.073,994.75 U9.126@370,994.75
  Bottom Layer w0.25: v1(215.75,1021.612) 221.314,1027.176 228.016,1027.176 243.18,1042.34 v1(345.059,1042.34)
G_INA2: R38.2 U9.127 | length 179.3
  Top Layer w0.25: R38.2@238.25,1012 v1(238.25,1014.476) ; v1(343.281,1036.32) 346.532,1033.069 346.532,1010.31 362.743,994.1 U9.127@370,994.1
  Bottom Layer w0.25: v1(238.25,1014.476) 248.689,1014.476 252.504,1018.291 254.386,1018.291 263.881,1027.786 268.224,1027.786 269.316,1028.878 269.316,1031.646 278.359,1040.689 338.912,1040.689 v1(343.281,1036.32)
G_INA3: R37.2 U9.128 | length 174
  Top Layer w0.25: R37.2@234.25,1012 234.25,1011.707 v1(235.723,1013.181) ; v1(327.232,1038.25) 342.417,1023.065 342.417,1012.389 361.286,993.521 369.702,993.521 U9.128@370,993.45
  Bottom Layer w0.25: v1(235.723,1013.181) 249.657,1013.181 253.111,1016.635 254.025,1016.635 263.55,1026.16 269.926,1026.16 277.419,1033.653 277.419,1037.336 278.333,1038.25 v1(327.232,1038.25)
G_INA4: R36.2 U9.130 | length 161.5
  Top Layer w0.25: v1(226.25,1007.745) R36.2@226.25,1012 ; U9.130@370,992.15 371.203,992.15 v1(371.323,992.03)
  Bottom Layer w0.25: v1(226.25,1007.745) 228.358,1005.637 257.912,1005.637 266.292,997.257 279.955,997.257 281.198,998.499 298.461,998.499 298.852,998.109 305.495,998.109 308.635,994.969 324.831,995.233 355.895,995.233 362.016,989.112 369.733,989.112 370.719,990.098 370.719,991.427 v1(371.323,992.03)
G_INA5: R35.2 U9.131 | length 161.5
  Top Layer w0.25: v1(218.75,1010.585) R35.2@218.75,1012 ; v1(368.478,991.489) 368.489,991.5 U9.131@370,991.5
  Bottom Layer w0.25: v1(218.75,1010.585) 254.031,1010.585 265.76,998.855 270.485,998.855 270.916,999.287 298.806,999.287 299.479,998.613 301.396,998.613 302.07,999.287 307.797,999.287 310.185,996.899 363.068,996.899 v1(368.478,991.489)
G_INA6: R34.2 U9.133 | length 184.2
  Top Layer w0.25: R34.2@241.75,1004.5 241.75,1005.528 246.456,1010.234 246.456,1028.983 260.829,1043.356 320.065,1043.356 341.02,1022.401 341.02,1011.733 v1(362.509,990.244) ; v1(368.986,990.244) 369.03,990.2 U9.133@370,990.2
  Bottom Layer w0.25: v1(362.509,990.244) v1(368.986,990.244)
G_INA7: R33.2 U9.134 | length 185.6
  Top Layer w0.25: v1(230.75,1003.275) R33.2@230.75,1004.5 ; U9.134@370,989.55 371.289,989.55 v1(372.313,990.575)
  Bottom Layer w0.25: v1(230.75,1003.275) 228.328,1003.275 225.828,1000.774 225.828,999.236 226.385,998.679 251.968,998.679 ; v1(372.313,990.575) 372.313,982.233 371.239,981.158 365.236,981.158 361.509,984.885 328.736,984.885 326.822,982.971 325.002,982.971 324.659,983.314 287.661,983.314 286.51,982.163 280.416,982.163 271.396,991.183 251.46,991.183 250.598,992.046 250.598,995.734 252.425,997.561 ; 251.968,998.679 252.984,998.679 253.263,998.4 252.425,997.561 ; 251.968,998.679 252.425,998.222 252.425,997.561
G_INB0: R81.2 R89.2 U9.136 | length 270.9
  Top Layer w0.25: 276.871,950 R89.2@278,950 ; v1(316.281,1039.724) 316.557,1040 R81.2@317.5,1040 ; v1(332.613,950.087) 332.613,993.572 337.515,998.474 v1(337.515,1007.364) ; U9.136@370,988.25 371.107,988.25 v1(371.627,987.73)
  Bottom Layer w0.25: 276.784,950.087 276.958,950.087 ; 276.871,950 276.958,950.087 ; v1(316.281,1039.724) 330.302,1039.724 338.709,1031.316 ; v1(332.613,950.087) 276.958,950.087 ; v1(337.515,1007.364) 339.039,1008.888 ; v1(371.627,987.73) 371.627,991.057 372.008,991.438 372.008,992.962 371.602,993.369 370.84,993.369 369.595,992.124 368.859,992.124 368.478,992.505 368.478,994.664 369.501,995.687 ; 338.709,1031.316 339.903,1030.122 339.903,1009.904 340.919,1008.888 ; 338.709,1031.316 338.709,1010.082 337.515,1008.888 339.039,1008.888 ; 339.039,1008.888 340.919,1008.888 ; 340.919,1008.888 372.288,1008.888 376.229,1004.947 ; 369.501,995.687 370.002,996.188 372.332,996.188 372.586,996.442 ; 369.501,995.687 371.856,995.687 372.586,996.417 372.586,996.442 ; 372.586,996.442 372.586,998.95 ; 372.586,998.95 375.031,1001.395 ; 372.586,998.95 372.586,999.737 374.244,1001.395 375.031,1001.395 ; 375.031,1001.395 376.229,1002.593 ; 376.229,1002.593 376.428,1002.792 376.428,1004.748 376.229,1004.947 ; 376.229,1002.593 376.229,1004.947
G_INB1: R80.2 R88.2 U9.137 | length 216
  Top Layer w0.25: R88.2@283,950 281.813,949.706 281.813,946.379 282.194,945.998 284.48,945.998 286.741,948.258 286.741,951.941 v1(287.02,952.221) ; v1(312.191,1038.936) 312.191,1040 R80.2@312.5,1040 ; v1(323.308,1038.936) 339.979,1022.265 339.979,1011.022 v1(362.61,988.39) 364.744,988.39 365.938,987.196 365.938,984.275 365.252,983.59 364.236,983.59 363.626,984.199 361.493,984.199 360.858,983.564 360.858,958.698 v1(360.121,957.961) ; v1(368.325,988.39) 369.116,987.6 U9.137@370,987.6
  Bottom Layer w0.25: v1(287.02,952.221) 327.762,952.221 329.108,953.567 355.727,953.567 v1(360.121,957.961) ; v1(312.191,1038.936) v1(323.308,1038.936) v1@323.58,1038.936 ; v1(362.61,988.39) v1(368.325,988.39)
G_INB2: R79.2 R87.2 U9.139 | length 262.9
  Top Layer w0.25: v1(287.706,953.186) 287.706,950 R87.2@288,950 ; v1(306.273,1039.8) 306.473,1040 R79.2@307.5,1040 ; v1(315.036,1039.8) 316.56,1038.276 318.008,1038.276 331.013,1025.271 331.013,979.236 331.8,978.448 331.8,961.009 v1(331.394,960.603) ; v1(360.157,961.517) 360.157,984.905 361.56,986.307 v1(363.474,986.307) ; 367.672,986.3 U9.139@370,986.3
  Bottom Layer w0.25: v1(287.706,953.186) 308.381,953.186 ; v1(306.273,1039.8) v1(315.036,1039.8) ; v1(360.157,961.517) 357.136,961.517 ; v1(363.474,986.307) 367.665,986.307 367.672,986.3 ; 308.381,953.186 308.889,953.186 316.306,960.603 ; 308.381,953.186 315.798,960.603 316.306,960.603 ; 316.306,960.603 v1(331.394,960.603) 331.8,961.009 354.906,961.009 355.414,961.517 ; 316.306,960.603 317.221,961.517 355.414,961.517 ; 355.414,961.517 355.778,961.881 356.772,961.881 357.136,961.517 ; 355.414,961.517 357.136,961.517
G_INB3: R78.2 R86.2 U9.140 | length 204.3
  Top Layer w0.25: R86.2@293,950 297.688,950 299.034,951.346 v1(299.034,986.307) ; R78.2@302.5,1040 301.549,1040 300.66,1039.111 300.66,1036.599 301.752,1035.507 303.784,1035.507 306.197,1037.92 313.792,1037.92 315.086,1036.626 315.086,1027.181 318.549,1023.717 318.549,1015.741 319.024,1015.266 v1(319.024,991.578) ; U9.140@370,985.65 370.71,985.65 v1(370.942,985.418)
  Bottom Layer w0.25: v1(299.034,986.307) 303.047,990.321 ; v1(370.942,985.418) 370.902,985.458 362.977,985.458 362.534,985.901 362.001,985.901 359.385,988.517 322.084,988.517 320.281,990.321 ; 303.047,990.321 304.304,991.578 v1(319.024,991.578) 320.281,990.321 ; 303.047,990.321 320.281,990.321
G_INB4: R77.2 R85.2 U9.142 | length 161.1
  Top Layer w0.25: R85.2@278,960 278.823,960 v1(279.73,960.907) ; v1(294.208,966.902) 295.046,967.74 v1(295.046,984.047) ; R77.2@317.5,1030.5 318.77,1030.246 319.053,1024.429 319.053,1016.09 320.599,1014.544 v1(320.599,988.263) ; U9.142@370,984.35 370.813,984.35 v1(370.815,984.352)
  Bottom Layer w0.25: v1(279.73,960.907) 285.725,966.902 v1(294.208,966.902) ; v1(295.046,984.047) 306.705,984.047 309.753,987.095 319.43,987.095 ; v1(320.599,988.263) 319.43,987.095 ; v1(370.815,984.352) 370.212,984.954 362.255,984.954 361.816,985.393 336.372,985.393 334.67,987.095 319.43,987.095
G_INB5: R76.2 R84.2 U9.143 | length 219.4
  Top Layer w0.25: v1(282.184,968.924) 282.184,963 R84.2@283,963 ; v1(312.191,1035.152) 312.191,1030.5 R76.2@312.5,1030.5 313.643,1030.5 314.427,1029.716 314.427,1025.017 317.297,1022.147 v1(317.297,971.245) ; v1(338.023,1011.784) 362.737,987.069 363.728,987.069 364.922,985.876 v1(364.922,984.275) ; v1(367.157,983.259) 367.598,983.7 U9.143@370,983.7
  Bottom Layer w0.25: v1(282.184,968.924) 283.464,970.204 289.346,970.204 290.907,971.765 ; v1(312.191,1035.152) 326.238,1035.152 337.515,1023.874 ; v1(364.922,984.275) 365.938,983.259 v1(367.157,983.259) ; 290.907,971.765 296.33,971.765 ; 290.907,971.765 291.81,972.668 295.427,972.668 296.33,971.765 ; 296.33,971.765 313.879,971.765 ; 313.879,971.765 316.777,971.765 v1(317.297,971.245) 314.399,971.245 313.879,971.765 ; 337.515,1023.874 338.023,1023.366 v1(338.023,1011.784) 337.515,1012.292 337.515,1023.874
G_INB6: R75.2 R83.2 U9.144 | length 221.9
  Top Layer w0.25: v1(286.08,961.822) 286.08,962.152 286.928,963 R83.2@288,963 ; v1(304.038,961.822) 304.038,983.742 302.514,985.266 302.514,999.388 302.855,999.729 302.855,1008.344 301.447,1009.752 301.447,1011.784 301.981,1012.317 301.981,1024.433 305.816,1028.268 305.816,1029.992 306.324,1030.5 R75.2@307.5,1030.5 ; U9.144@370,983.05 371.856,983.05 373.699,981.207 373.699,972.428 371.475,970.204 v1(371.475,959.079)
  Bottom Layer w0.25: v1(304.038,961.822) 287.528,961.822 ; v1(371.475,959.079) 365.191,952.794 336.264,952.794 334.987,951.517 286.512,951.517 286.08,951.949 286.08,960.374 ; 286.08,960.374 v1(286.08,961.822) 287.528,961.822 ; 286.08,960.374 287.528,961.822
G_INB7: R74.2 R82.2 U9.145 | length 217.4
  Top Layer w0.25: v1(291.77,963) R82.2@293,963 297.19,963 298.355,964.165 298.355,996.08 294.64,999.795 294.64,1013.943 295.326,1014.628 298.196,1014.628 299.574,1016.007 299.574,1028.83 301.244,1030.5 R74.2@302.5,1030.5 ; v1(361.442,951.179) 361.442,982.472 362.458,983.488 362.701,983.488 363.789,982.4 v1(365.785,982.4) ; v1(369.164,982.4) U9.145@370,982.4
  Bottom Layer w0.25: v1(291.77,963) 285.658,963 285.137,962.478 285.137,951.677 285.801,951.013 361.276,951.013 v1(361.442,951.179) ; v1(365.785,982.4) 366.501,981.685 368.448,981.685 ; 368.448,981.685 368.706,981.685 369.164,982.142 v1(369.164,982.4) 368.448,981.685
GA0: C126.2 R152.1 U14.8 | length 97.8
  Top Layer w0.25: v1(450.45,958.901) R152.1@450.45,969.85 ; v1(482.908,965) 485.115,967.207 485.115,1012.615 U14.8@487.5,1015
  Bottom Layer w0.25: v1(450.45,958.901) 470.401,958.901 C126.2@476.5,965 v1(482.908,965)
GA1: C124.2 R151.1 U14.10 | length 77
  Top Layer w0.25: 450.45,973.639 R151.1@450.45,974.85
  Bottom Layer w0.25: 450.444,973.633 450.456,973.633 ; 450.45,973.639 450.456,973.633 ; U14.10@487.5,1010 488.397,1010 489.509,1008.888 489.509,976.986 489.026,976.503 480.503,976.503 C124.2@476.5,972.5 475.367,973.633 450.456,973.633
GA2: C122.2 R150.1 U14.4 | length 84.3
  Top Layer w0.25: R150.1@450.45,979.85 450.45,980.897 v1(452.73,980.897) ; v1(475.615,1024.357) 475.615,980.885 C122.2@476.5,980
  Bottom Layer w0.25: v1(452.73,980.897) 475.603,980.897 C122.2@476.5,980 ; v1(475.615,1024.357) 486.857,1024.357 U14.4@487.5,1025
GA3: C120.2 R149.1 U14.6 | length 66
  Top Layer w0.25: 450.45,983.621 R149.1@450.45,984.85 ; v1(479.095,990.603) 479.095,996.721 482.803,1000.43 482.803,1015.303 U14.6@487.5,1020
  Bottom Layer w0.25: 450.444,983.615 450.456,983.615 ; 450.45,983.621 450.456,983.615 ; v1(479.095,990.603) 479.095,990.095 C120.2@476.5,987.5 472.615,983.615 450.456,983.615
GA4: C118.2 R148.1 U14.7 | length 88.9
  Top Layer w0.25: v1(450.95,988.619) R148.1@450.95,989.85 ; v1(479.984,991.282) 479.984,996.213 484.073,1000.303 484.073,1014.073 U14.7@487.5,1017.5
  Bottom Layer w0.25: C118.2@476.5,995 472.782,991.282 ; v1(479.984,991.282) 472.782,991.282 ; 472.782,991.282 453.613,991.282 v1(450.95,988.619) 470.119,988.619 472.782,991.282
GA5: C115.2 R147.1 U14.11 | length 60.9
  Top Layer w0.25: R147.1@450.95,994.85 451.747,994.85 457.86,1000.963 457.86,1012.444 v1(458.876,1013.46)
  Bottom Layer w0.25: v1(458.876,1013.46) 465.54,1013.46 C115.2@476.5,1002.5 478.011,1004.011 488.188,1004.011 488.493,1004.316 488.493,1006.507 U14.11@487.5,1007.5